# Altium PCB v1.5 PCB.PcbDoc (part 2 of 2)
Units mm, origin at the board's own origin, x right, y up, seen from the top; angles counter-clockwise.
Board outline 35.67 x 48.94 mm, 4 copper layers (Top Power Plane, Internal Ground Plane, Internal Signal Plane, Bottom Signal Layer), stack 0.972 mm thick; 81 components, 63 nets, 319 pads, 139 vias.
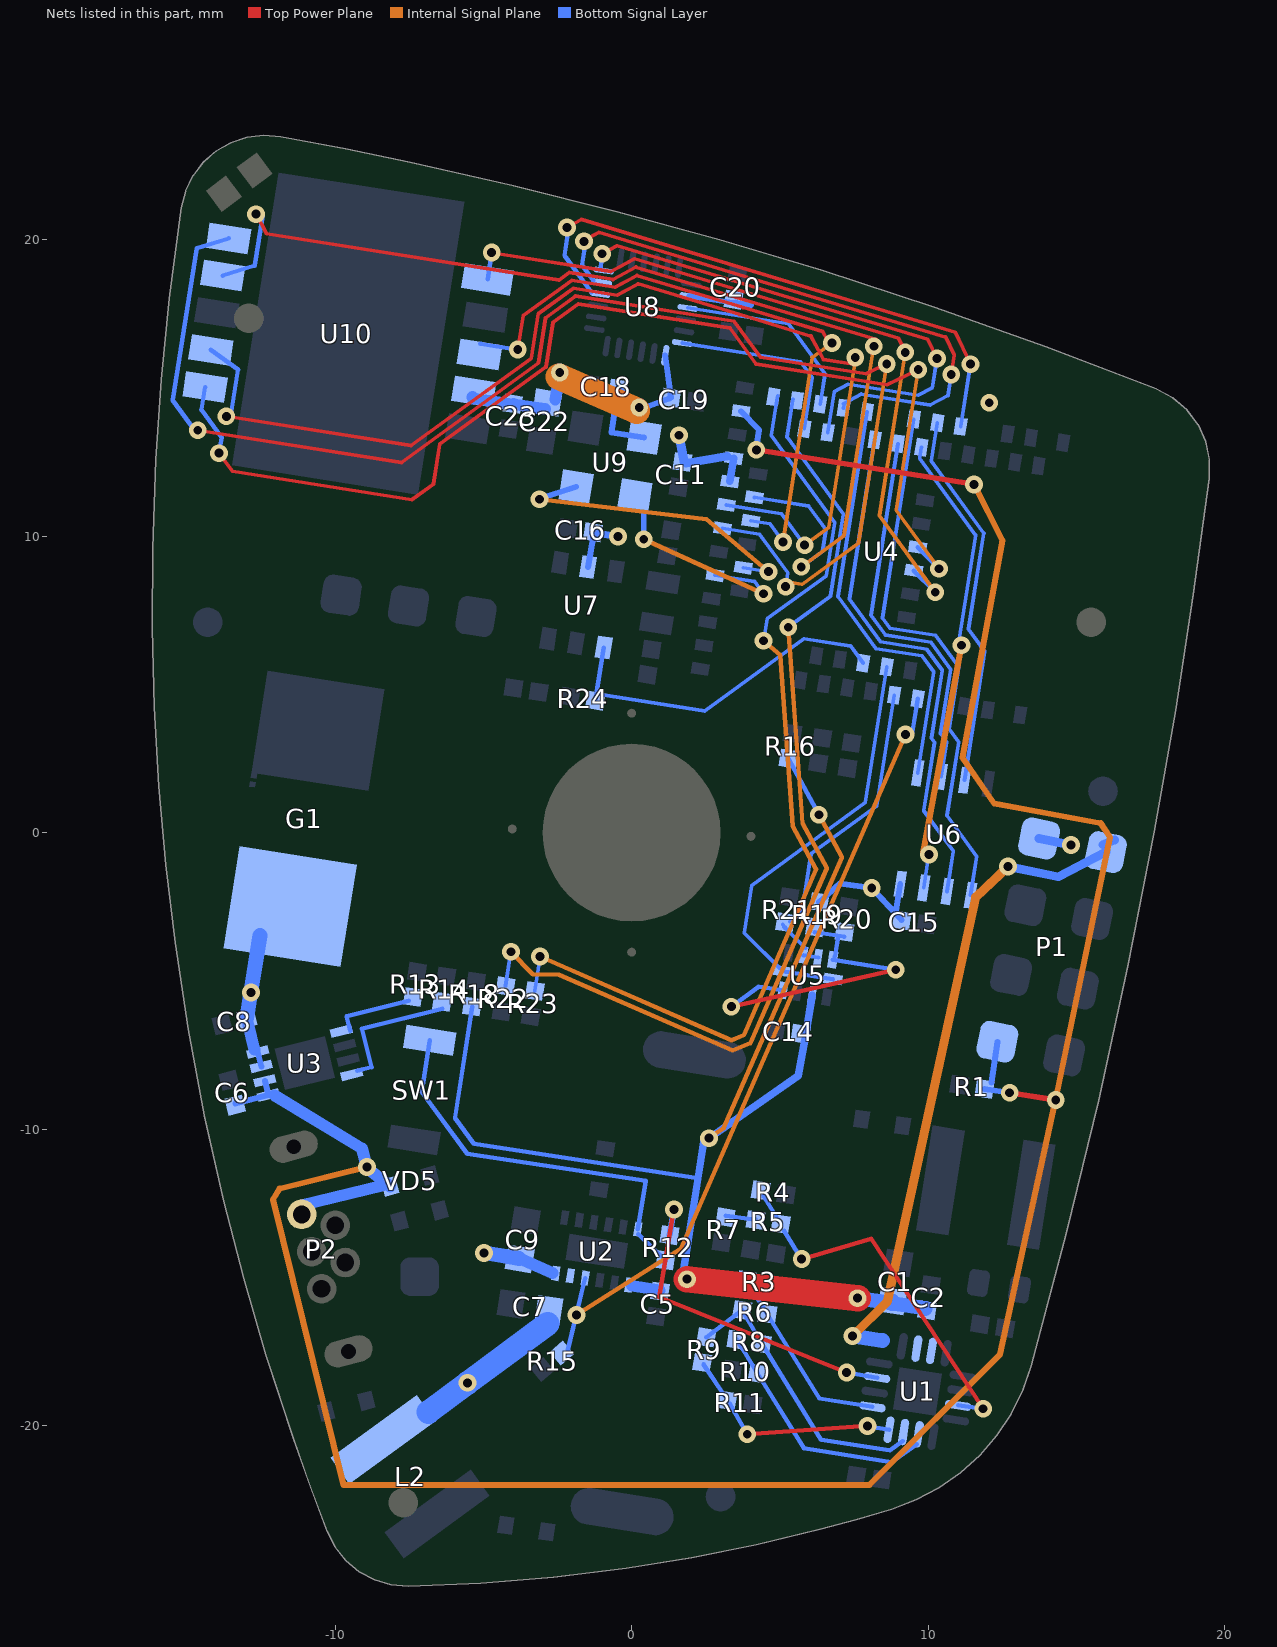
[diagram p4: the nets of this part, all layers, seen from the top]

## Via types
v1: diameter 0.6, hole 0.3, Top Power Plane to Bottom Signal Layer, tented both sides, 139 vias

## Nets (pads, with @x,y where several pads share a name; then routed paths per layer and width w, separated by ;. In a path a pad name is that pad's centre, name@x,y a point inside that pad or via, vN(x,y) a via of type N, cw(c..) or ccw(c..) an arc to the next point about the centre after c; other vN are vias at no path point) (continued)
NetR3_2: R3.2 R6.1 U1.9 | length 6.5
  Bottom Signal Layer w0.15: R3.2@3.861,-15.099 3.921,-15.195 4.515,-16.146 R6.1@4.575,-16.242 ; R6.1@4.576,-16.243 6.328,-19.086 U1.9@8.122,-19.369
NetR4_2: R4.2 R5.1 U1.3 | length 12.4
  Top Power Plane w0.15: v1(5.735,-14.386) 8.082,-13.696 v1(11.858,-19.434)
  Bottom Signal Layer w0.15: R4.2@4.442,-12.242 R5.1@5.031,-13.198 ; R5.1@5.146,-13.43 v1(5.735,-14.386) ; U1.3@11.015,-19.321 v1(11.858,-19.434)
NetR5_2: R5.2 R7.1 | length 1
  Bottom Signal Layer w0.15: R7.1@3.182,-12.927 R5.2@4.182,-13.064
NetR6_2: R6.2 R8.1 R9.1 U1.7 | length 9.5
  Bottom Signal Layer w0.15: R9.1@2.517,-17.025 2.52,-17.024 3.664,-16.155 R6.2@3.725,-16.108 ; R6.2@3.726,-16.109 3.785,-16.208 4.086,-16.714 4.337,-17.135 4.396,-17.235 R8.1@4.4,-17.242 ; R8.1@4.4,-17.242 6.393,-20.476 8.704,-20.84 U1.7@9.146,-20.522
NetR8_2: R8.2 R10.1 U1.6 | length 8.4
  Bottom Signal Layer w0.15: R8.2@3.551,-17.108 3.606,-17.198 3.864,-17.616 3.935,-17.731 4.193,-18.149 R10.1@4.25,-18.242 ; R10.1@4.25,-18.242 4.253,-18.247 5.809,-20.771 8.772,-21.238 U1.6@9.624,-20.625
NetR9_2: R9.2 R11.1 U1.8 | length 7.4
  Top Power Plane w0.15: v1(3.9,-20.292) v1(7.961,-20.014)
  Bottom Signal Layer w0.15: R9.2@2.425,-17.937 2.426,-17.938 R11.1@3.226,-19.133 ; R11.1@3.295,-19.252 v1@3.9,-20.292 ; v1@7.958,-20.027 U1.8@8.683,-20.141
NetR12_1: R12.1 U1.11 | length 11.7
  Top Power Plane w0.15: v1(1.427,-12.714) 0.929,-15.665 v1(7.253,-18.209)
  Bottom Signal Layer w0.15: v1@7.312,-18.221 U1.11@8.279,-18.381
  Bottom Signal Layer w0.2: R12.1@1.278,-13.577 v1(1.427,-12.714)
NetR12_2: R12.2 SW1.1 U2.12 | length 13.4
  Bottom Signal Layer w0.15: SW1.1@-6.808,-7.006 -7.075,-8.749 -5.55,-10.825 0.471,-11.748 U2.12@0.208,-13.382 ; U2.12@0.227,-13.54 R12.2@1.144,-14.427
NetR13_2: R13.2 U3.5 | length 2.7
  Bottom Signal Layer w0.15: U3.5@-9.495,-6.681 -9.51,-6.624 -9.617,-6.195 R13.2@-7.512,-5.667
NetR14_1: R14.1 U3.8 | length 4.6
  Bottom Signal Layer w0.15: U3.8@-9.257,-8.029 -8.773,-7.907 -9.097,-6.616 R14.1@-6.38,-5.935
NetR15_1: R15.1 U2.4 U4.4 | length 26.9
  Internal Signal Plane w0.15: v1(-1.864,-16.273) 1.671,-14.03 v1(9.238,3.312)
  Bottom Signal Layer w0.15: R15.1@-2.172,-17.526 -1.87,-16.272 U2.4@-1.571,-15.024 ; v1@9.457,3.314 U4.4@9.646,4.514
NetR19_2: R19.2 R20.1 U5.4 U5.9 | length 11.5
  Top Power Plane w0.15: v1(3.364,-5.87) v1(8.91,-4.624)
  Bottom Signal Layer w0.15: v1(3.364,-5.87) 4.295,-5.192 U5.9@5.102,-5.319 ; R19.2@6.184,-3.354 7.159,-3.503 7.164,-3.504 R20.1@7.18,-3.506 ; U5.4@6.783,-4.289 v1(8.91,-4.624) ; U5.4@6.859,-4.176 R20.1@6.968,-3.493
NetR21_1: R21.1 U4.6 U5.2 U5.3 | length 10.8
  Bottom Signal Layer w0.125: R21.1@5.097,-3.099 5.138,-3.155 5.143,-3.161 R21.1@5.17,-3.198 ; R21.1@5.167,-3.192 R21.1@5.17,-3.198 ; R21.1@5.19,-3.221 R21.1@5.177,-3.208 ; R21.1@5.337,-3.003 5.738,-2.711 6.052,-0.713 8.267,0.899 U4.6@8.856,4.639 ; U5.2@5.878,-3.904 5.183,-3.216 5.179,-3.211 R21.1@5.177,-3.208 ; R21.1@5.17,-3.198 5.171,-3.201 5.172,-3.203 R21.1@5.177,-3.208 ; R21.1@5.17,-3.198 5.172,-3.202 R21.1@5.177,-3.208
  Bottom Signal Layer w0.15: R21.1@5.148,-3.183 5.163,-3.196 5.167,-3.2 5.172,-3.205 5.179,-3.211 R21.1@5.19,-3.221 ; U5.2@5.796,-4.133 U5.3@6.29,-4.211
NetR22_1: R22.1 U4.35 | length 33.9
  Internal Signal Plane w0.15: v1(-4.073,-4.018) -3.334,-4.779 -2.446,-4.792 3.411,-7.347 4.01,-7.1 6.583,-1.203 5.764,0.312 v1(5.285,6.929)
  Bottom Signal Layer w0.125: R22.1@-4.256,-5.18 v1(-4.073,-4.018) ; v1@5.423,7.041 5.43,7.047 6.707,7.976 7.142,10.738 5.241,13.35 5.438,14.597 U4.35@5.442,14.623
NetR23_1: R23.1 U4.34 | length 33
  Internal Signal Plane w0.15: v1(-3.087,-4.181) 3.375,-7.001 3.787,-6.825 6.225,-1.236 5.434,0.228 5.017,5.985 v1(4.45,6.475)
  Bottom Signal Layer w0.125: R23.1@-3.27,-5.344 v1(-3.087,-4.181) ; v1@4.458,6.474 4.575,7.218 6.563,8.665 6.846,10.466 4.715,13.395 4.917,14.679 U4.34@4.925,14.727
NetR24_1: R24.1 U4.9 U7.1 | length 11.8
  Bottom Signal Layer w0.125: R24.1@-1.044,4.66 2.47,4.107 5.817,6.543 7.39,6.295 U4.9@7.812,5.716
  Bottom Signal Layer w0.15: R24.1@-1.225,4.448 U7.1@-0.94,6.242
NetU4_7: U4.7 U5.5 U5.10 | length 14.5
  Bottom Signal Layer w0.125: U5.10@5.093,-4.67 3.798,-3.387 4.051,-1.776 7.881,1.011 U4.7@8.602,5.591
  Bottom Signal Layer w0.15: U5.10@5.093,-4.67 U5.5@6.792,-4.939
NetU4_20: U4.20 U9.2 | length 7.2
  Internal Signal Plane w0.15: v1(0.408,9.899) v1(4.449,8.06)
  Bottom Signal Layer w0.125: U4.20@2.815,8.684 4.147,8.475 v1@4.449,8.06
  Bottom Signal Layer w0.2: v1(0.408,9.899) U9.2@0.408,10.801
NetU4_21: U4.21 U9.3 | length 10.6
  Internal Signal Plane w0.15: v1(-3.103,11.248) 2.526,10.575 v1(4.616,8.805)
  Bottom Signal Layer w0.125: U4.21@3.766,8.939 v1(4.616,8.805)
  Bottom Signal Layer w0.2: v1@-3.107,11.265 U9.3@-1.869,11.669
NetU4_24: U4.24 U10.10 | length 46.6
  Top Power Plane w0.125: v1(-14.638,13.575) -7.764,12.488 -3.143,15.848 -2.904,17.364 -1.891,18.101 3.457,17.255 4.342,16.039 7.907,15.476 v1(8.607,15.812)
  Internal Signal Plane w0.125: v1@5.351,8.44 5.747,8.377 7.655,9.766 v1(8.607,15.812)
  Bottom Signal Layer w0.125: U4.24@3.065,10.265 4.316,10.068 5.269,8.758 v1(5.196,8.297)
  Bottom Signal Layer w0.15: v1@-14.715,13.531 -15.485,14.59 -14.673,19.711 U10.10@-13.595,20.046
NetU4_25: U4.25 U10.3 | length 22.2
  Top Power Plane w0.125: v1@-3.838,16.295 -3.655,17.446 -2.024,18.63 -0.558,18.398 0.177,18.792 ; v1@6.55,16.416 6.553,16.411 v1@6.562,16.393 ; v1@6.593,16.628 6.444,16.905 3.752,17.717 0.196,18.789 ; 0.177,18.792 0.196,18.789 ; 0.177,18.792 0.18,18.794 0.196,18.789
  Internal Signal Plane w0.125: v1(5.107,9.809) 6.087,16.032 v1(6.76,16.522) ; v1@6.994,16.485 6.996,16.492 v1@6.996,16.495
  Bottom Signal Layer w0.125: U4.25@4.016,10.519 4.665,10.417 v1(5.107,9.809)
  Bottom Signal Layer w0.15: U10.3@-5.109,16.49 -5.078,16.485 v1(-3.842,16.296)
NetU4_26: U4.26 U10.7 | length 37.4
  Top Power Plane w0.125: v1(-13.671,14.043) -7.442,13.059 -3.387,16 -3.147,17.506 -1.962,18.365 -0.487,18.132 0.218,18.511 3.629,17.482 6.048,16.752 6.473,15.961 7.493,15.8 7.487,15.801 v1@7.478,15.804
  Internal Signal Plane w0.125: v1(5.838,9.697) 6.652,10.29 7.555,16.025 v1@7.555,16.027
  Bottom Signal Layer w0.125: U4.26@3.19,11.055 5.057,10.761 v1@5.788,9.756
  Bottom Signal Layer w0.15: U10.7@-14.191,16.283 -13.277,15.622 -13.531,14.021 v1@-13.546,13.927
  other v1: 7.545,16.027
NetU4_27: U4.27 U10.9 | length 37.6
  Top Power Plane w0.125: v1(-12.667,20.863) -12.312,20.202 -2.447,18.643 -2.106,18.896 -0.63,18.663 0.146,19.079 8.239,16.638 8.24,16.638 8.241,16.638 v1@8.25,16.635
  Internal Signal Plane w0.125: v1(5.722,8.966) 7.164,10.016 v1(8.171,16.409)
  Bottom Signal Layer w0.125: U4.27@4.142,11.309 5.973,11.021 6.555,10.221 6.439,9.488 v1(5.722,8.966)
  Bottom Signal Layer w0.15: U10.9@-13.794,18.792 -12.716,19.128 v1@-12.447,20.824
NetU4_36: U4.36 U8.12 | length 6.5
  Bottom Signal Layer w0.125: U8.12@1.705,16.517 5.702,15.887 6.096,15.346 U4.36@5.824,13.624
NetU4_37: U4.37 U8.9 | length 6.6
  Bottom Signal Layer w0.125: U8.9@1.893,17.702 5.289,17.167 6.521,15.474 U4.37@6.36,14.451
NetU4_38: U4.38 U8.24 | length 18.6
  Top Power Plane w0.125: v1(-0.993,19.527) -0.487,19.799 9.992,16.639 v1(10.299,15.998)
  Bottom Signal Layer w0.125: U4.38@6.615,13.499 6.831,14.873 7.298,15.124 9.666,14.751 10.143,15.008 v1(10.299,15.998)
  Bottom Signal Layer w0.15: U8.24@-1.065,18.98 v1@-0.982,19.526
NetU4_39: U4.39 U8.23 | length 20.2
  Top Power Plane w0.125: v1@-1.54,20.016 -1.109,20.248 10.595,16.718 10.886,16.112 ; v1(10.782,15.457) 10.886,16.112 ; 10.888,16.11 10.886,16.112
  Bottom Signal Layer w0.125: U4.39@7.15,14.325 U4.39@7.176,14.487 ; U4.39@7.15,14.473 U4.39@7.176,14.487 ; 7.747,14.795 7.742,14.792 ; v1(10.782,15.457) 10.67,14.746 10.073,14.424 7.742,14.792 ; U4.39@7.176,14.487 7.742,14.792
  Bottom Signal Layer w0.15: v1@-1.54,20.016 -1.552,19.94 -1.673,19.144 U8.23@-1.286,18.618
  other v1: -1.605,19.948
NetU4_41: U4.41 U6.1 | length 14.2
  Bottom Signal Layer w0.125: U4.41@7.941,14.2 6.959,7.966 8.238,6.209 9.801,5.963 10.192,5.425 U6.1@9.655,2.015
NetU4_42: U4.42 U6.6 | length 17.6
  Bottom Signal Layer w0.125: U4.42@8.195,13.249 7.349,7.875 8.395,6.437 9.955,6.191 10.477,5.475 10.116,3.186 10.217,3.048 9.854,0.741 10.854,-0.634 U6.6@10.641,-1.988
NetU4_43: U4.43 U6.2 | length 14.6
  Bottom Signal Layer w0.125: 8.759,11.689 U4.43@8.985,13.124 8.073,7.333 8.558,6.667 10.097,6.425 10.76,5.513 10.419,3.346 10.629,3.057 U6.2@10.445,1.89
NetU4_44: U4.44 U6.5 | length 18.3
  Bottom Signal Layer w0.125: U4.44@9.521,13.95 8.465,7.243 8.716,6.898 10.251,6.656 11.037,5.576 10.71,3.502 11.03,3.062 10.639,0.58 11.639,-0.793 U6.5@11.431,-2.113
NetU4_45: U4.45 U6.7 | length 15.6
  Internal Signal Plane w0.2: v1@9.834,-0.703 v1(11.123,6.322)
  Bottom Signal Layer w0.125: U4.45@9.775,12.999 9.717,12.631 11.605,10.038 11.038,6.439 v1(11.123,6.322) ; U6.7@9.851,-1.863 v1(10.028,-0.738)
NetU4_46: U4.46 U6.3 | length 12.9
  Bottom Signal Layer w0.125: U4.46@10.311,13.825 10.108,12.537 11.876,10.108 ; U6.3@11.226,1.766 11.911,6.115 11.365,6.864 11.876,10.108 ; 11.884,10.096 11.876,10.108
NetU4_48: U4.48 U8.22 | length 19.6
  Top Power Plane w0.125: v1@-2.176,20.423 -2.102,20.463 -1.689,20.685 10.914,16.884 v1(11.433,15.804)
  Bottom Signal Layer w0.125: U4.48@11.101,13.7 v1(11.433,15.804)
  Bottom Signal Layer w0.15: v1@-2.111,20.48 -2.122,20.408 -2.265,19.471 U8.22@-1.358,18.236
  other v1: -2.176,20.417
NetU4_58: U4.58 U10.1 | length 25.5
  Top Power Plane w0.125: v1(-4.721,19.566) -0.704,18.931 0.097,19.361 9.005,16.675 v1(9.232,16.202)
  Internal Signal Plane w0.125: v1(9.232,16.202) 8.364,10.693 v1(10.244,8.111)
  Bottom Signal Layer w0.15: U10.1@-4.859,18.663 v1(-4.721,19.566) ; U4.58@9.521,8.837 v1@10.244,8.115
NetU4_59: U4.59 U10.6 | length 39.2
  Top Power Plane w0.125: v1(-13.918,12.802) -13.47,12.186 -7.414,11.229 -6.681,11.762 -6.468,13.109 ; -6.469,13.109 -2.891,15.711 -2.654,17.208 -1.797,17.832 3.315,17.024 4.199,15.808 ; 4.206,15.799 4.199,15.808 ; v1(9.67,15.619) 8.612,15.111 4.199,15.808
  Internal Signal Plane w0.125: v1(9.67,15.619) 8.924,10.886 v1(10.369,8.901)
  Bottom Signal Layer w0.15: U10.6@-14.39,15.029 -14.511,14.268 -13.833,13.335 v1(-13.918,12.802) ; U4.59@9.646,9.627 v1@10.369,8.905
"VCC_CHARGE 3.0 - 4.2 V": C8.1 G1.1 P1.2 U1.14 U3.3 U3.4 | length 26.3
  Internal Signal Plane w0.3: v1(7.454,-16.98) 8.633,-15.8 11.606,-2.174 v1(12.701,-1.141)
  Bottom Signal Layer w0.2: U3.4@-12.613,-7.398 U3.3@-12.492,-7.883
  Bottom Signal Layer w0.3: v1(12.701,-1.141) 14.382,-1.489 P1.2@15.998,-0.658 ; P1.2@15.899,-0.407 P1.2@16.298,-0.25
  Bottom Signal Layer w0.4: C8.1@-12.935,-6.46 -12.934,-6.465 -12.933,-6.467 U3.4@-12.727,-7.316
  Bottom Signal Layer w0.5: C8.1@-12.981,-6.263 v1(-12.843,-5.391) G1.1@-12.538,-3.471 ; v1(7.454,-16.98) 8.46,-17.134
"VCC_LOAD 1.8 V": C9.1 C15.1 C18.1 C19.1 C20.1 C22.1 C23.1 R19.1 U2.6 U6.8 U8.8 U8.13 U9.1 U10.4 | length 21.2
  Internal Signal Plane w0.9: v1@-2.45,15.384 v1@0.176,14.235
  Bottom Signal Layer w0.2: C18.1@-0.454,14.981 -0.683,13.501 U9.1@0.419,13.331 ; v1@0.298,14.286 C19.1@1.281,14.651 ; U8.13@1.133,16.101 C19.1@1.325,14.671 ; U8.8@1.955,18.097 3.417,17.874 3.426,17.872 C20.1@3.429,17.872 ; C20.1@3.517,17.881 3.552,17.876 3.561,17.875 4.027,17.801 ; R19.1@6.327,-2.341 7.023,-1.711 v1(8.101,-1.871) C15.1@8.904,-2.733 ; U6.8@9.061,-1.738 C15.1@8.904,-2.733 ; C15.1@9.106,-2.95 C15.1@8.904,-2.733
  Bottom Signal Layer w0.25: C18.1@-0.454,14.981 -0.453,14.98 v1@0.245,14.335
  Bottom Signal Layer w0.4: U10.4@-5.366,14.693 -5.357,14.65 C23.1@-4.028,14.443 ; C23.1@-3.986,14.455 C22.1@-2.924,14.29 ; C9.1@-3.774,-14.368 U2.6@-2.668,-14.857 ; C22.1@-2.578,14.609 v1(-2.425,15.52)
  Bottom Signal Layer w0.5: v1(-4.975,-14.175) C9.1@-3.795,-14.364
  other v1: 0.256,14.347 12.065,14.501
"VCC_MAIN 1.8 V": C7.1 C11.1 C16.1 L2.1 P1.1 U2.5 U4.28 U4.30 U7.5 | length 11.3
  Bottom Signal Layer w0.2: U7.5@-1.472,8.959 -1.27,10.118 -1.268,10.126 -1.268,10.127 -1.253,10.212 C16.1@-1.253,10.214
  Bottom Signal Layer w0.25: C16.1@-1.308,10.124 -1.302,10.123 -1.27,10.118 v1(-0.462,9.99) ; U4.28@3.315,11.845 U4.30@3.44,12.635
  Bottom Signal Layer w0.3: v1(1.598,13.407) 1.763,12.539 1.764,12.534 C11.1@1.767,12.515 ; C11.1@1.835,12.463 U4.30@3.218,12.699 ; P1.1@13.745,-0.196 v1(14.818,-0.415)
  Bottom Signal Layer w0.8: L2.1@-6.852,-19.541 -5.534,-18.566 -2.831,-16.567
  other v1: -5.539,-18.559
"VCC_STORE 3.0 - 4.2 V": C1.1 C2.1 C5.1 C14.1 R16.2 R18.2 U1.15 U2.1 U5.7 | length 48.5
  Top Power Plane w0.9: v1(1.866,-15.063) v1(7.624,-15.703)
  Internal Signal Plane w0.15: v1@2.595,-10.343 2.611,-10.307 v1@2.612,-10.304 ; v1(2.609,-10.306) v1@2.612,-10.304 ; v1(6.315,0.604) 7.091,-0.831 3.103,-9.97 v1@2.612,-10.304
  Bottom Signal Layer w0.15: R18.2@-5.381,-5.866 R18.2@-5.383,-5.868 -5.957,-9.625 -5.315,-10.5 2.237,-11.657 ; R16.2@5.291,2.496 v1(6.315,0.604)
  Bottom Signal Layer w0.25: v1@1.704,-15.07 1.709,-15.039 2.237,-11.657 v1@2.447,-10.314 ; v1(2.609,-10.306) 5.625,-8.201 5.872,-6.816 5.872,-6.814 U5.7@6.089,-5.476
  Bottom Signal Layer w0.4: U2.1@0.009,-15.281 C5.1@0.948,-15.441
  Bottom Signal Layer w0.5: v1@7.624,-15.705 8.781,-15.879 C2.1@9.902,-16.048 ; v1(7.624,-15.703) C1.1@8.781,-15.869 ; C1.1@8.778,-15.857 C1.1@8.794,-15.795
"VCC_USB 5.0 V": C6.1 P1.7 P2.1 R1.1 U3.1 U3.2 U4.32 VD5.2 | length 93.2
  Top Power Plane w0.2: v1(4.206,12.914) v1@11.555,11.753 ; v1(12.752,-8.774) v1(14.306,-9.014)
  Internal Signal Plane w0.2: v1(-8.928,-11.279) -11.875,-12.009 -12.097,-12.375 -9.715,-22.007 8.019,-22.007 12.429,-17.597 14.302,-9.014 14.307,-8.991 14.327,-8.9 16.133,-0.161 15.825,0.32 12.233,0.979 11.165,2.527 12.51,9.858 v1(11.554,11.748)
  Bottom Signal Layer w0.2: C6.1@-13.372,-9.135 U3.1@-12.25,-8.854 U3.2@-12.371,-8.368 ; U4.32@3.691,14.215 4.299,13.581 v1@4.197,12.916 ; R1.1@11.9,-8.642 v1(12.752,-8.774) ; R1.1@12.136,-8.425 P1.7@12.338,-7.053
  Bottom Signal Layer w0.4: U3.1@-12.052,-8.858 -9.096,-10.652 v1@-8.941,-11.282 ; P2.1@-11.137,-12.573 -8.419,-11.908 ; v1@-8.935,-11.308 VD5.2@-8.151,-11.931
pads on no net: Designator3.0 Designator4.0 Designator5.0 Designator6.0 Designator7.0 Designator8.0 P2.4 U2.7 U3.7 U4.3 U4.5 U4.8 U4.10 U4.11 U4.12 U4.13 U4.19 U4.22 U4.23 U4.29 U4.31 U4.40 U4.47 U4.49 U4.50 U4.52 U4.54 U4.56 U4.57 U4.60 U4.61 U8.1 U8.2 U8.3 U8.4 U8.5 U8.6 U8.7 U8.14 U8.15 U8.16 U8.17 U8.19 U8.21 U10.2 U10.8
copper on no net: | length 116.8
  Top Power Plane w0.9: -14.395,-3.233 -14.395,4.242 ; -1.601,9.338 -0.808,14.557 cw(c0.242,14.334) 1.152,14.905 ; 16.199,-1.76 17.99,9.073
  Top Power Plane w1.5: -14.7,7.275 -1.475,9.175 ; -14.1,-3.275 -0.875,-6.525 ; -14.1,4.2 -0.875,6.125 ; 0.845,11.766 17.692,9.083 ; 1.475,-5.025 15.9,-1.75 ; 1.475,14.874 17.096,12.386
  Bottom Signal Layer w0.15: -9.66,-14.501 -7.15,-14.975

## Polygon pours and split planes (outlines as drawn)
GND on Internal Ground Plane "GND_L02_P025" (solid, remove dead copper, pour order 25): 13.483,-17.983 14.666,-13.524 15.752,-9.037 16.742,-4.516 17.633,0.028 18.349,4.133 18.953,8.035 19.483,11.945 19.493,12.574 19.366,13.189 19.108,13.762 18.731,14.264 18.254,14.673 17.699,14.968 13.978,16.394 10.218,17.727 6.418,18.966 2.97,19.999 -0.497,20.952 -3.981,21.824 -7.475,22.614 -9.651,23.063 -11.832,23.481 -12.405,23.527 -12.976,23.459 -13.521,23.279 -14.02,22.993 -14.451,22.613 -14.799,22.156 -15.048,21.638 -15.189,21.081 -15.59,18.029 -15.864,15.281 -16.051,12.573 -16.161,9.583 -16.174,6.898 -16.104,4.225 -15.952,1.565 -15.718,-1.082 -15.403,-3.717 -14.957,-6.634 -14.41,-9.538 -13.762,-12.432 -13.091,-15.028 -12.338,-17.611 -11.403,-20.474 -10.849,-22.033 -10.267,-23.581 -10.003,-24.101 -9.639,-24.556 -9.191,-24.929 -8.677,-25.203 -8.118,-25.367 -7.537,-25.415 -5.086,-25.317 -2.636,-25.117 -0.18,-24.815 2.019,-24.458 4.2,-24.02 6.355,-23.503 7.568,-23.174 8.774,-22.819 9.597,-22.509 10.375,-22.099 11.096,-21.595 11.748,-21.004 12.321,-20.337 12.806,-19.603 13.195,-18.814
"VCC_MAIN 1.8 V" on Internal Signal Plane "VCC_MAIN_1.8_V_L03_P023" (solid, remove dead copper, pour order 23): 13.483,-17.983 14.666,-13.524 15.752,-9.037 16.742,-4.516 17.633,0.028 18.349,4.133 18.953,8.035 19.483,11.945 19.493,12.574 19.366,13.189 19.108,13.762 18.731,14.264 18.254,14.673 17.699,14.968 13.978,16.394 10.218,17.727 6.418,18.966 2.97,19.999 -0.497,20.952 -3.981,21.824 -7.475,22.614 -9.651,23.063 -11.832,23.481 -12.405,23.527 -12.976,23.459 -13.521,23.279 -14.02,22.993 -14.451,22.613 -14.799,22.156 -15.048,21.638 -15.189,21.081 -15.59,18.029 -15.864,15.281 -16.051,12.573 -16.161,9.583 -16.174,6.898 -16.104,4.225 -15.952,1.565 -15.718,-1.082 -15.403,-3.717 -14.957,-6.634 -14.41,-9.538 -13.762,-12.432 -13.091,-15.028 -12.338,-17.611 -11.403,-20.474 -10.849,-22.033 -10.267,-23.581 -10.003,-24.101 -9.639,-24.556 -9.191,-24.929 -8.677,-25.203 -8.118,-25.367 -7.537,-25.415 -5.086,-25.317 -2.636,-25.117 -0.18,-24.815 2.019,-24.458 4.2,-24.02 6.355,-23.503 7.568,-23.174 8.774,-22.819 9.597,-22.509 10.375,-22.099 11.096,-21.595 11.748,-21.004 12.321,-20.337 12.806,-19.603 13.195,-18.814
"VCC_CHARGE 3.0 - 4.2 V" on Internal Signal Plane "VCC_CHARGE_3.0_-_4.2_V_L03_P021" (solid, remove dead copper, pour order 21): 7.491,-16.683 -0.63,-15.602 -7.234,-7.152 -12.755,-5.181 -13.07,-5.654 -3.052,-18.034 3.028,-19.069 7.55,-17.262
NetL1_2 on Bottom Signal Layer "NETL1_2_L04_P015" (solid, pour order 15): 11.431,-15.384 10.688,-13.446 9.777,-13.446 10.527,-15.652 10.527,-17.209 10.789,-17.323 11.201,-16.911
"VCC_CHARGE 3.0 - 4.2 V" on Bottom Signal Layer "VCC_CHARGE_3.0_-_4.2_V_L04_P017" (solid, pour order 17): 9.806,-17.062 9.652,-16.565 8.256,-16.345 8.102,-17.33 8.924,-17.458 9.52,-17.055 9.52,-17.189
"VCC_LOAD 1.8 V" on Bottom Signal Layer "VCC_LOAD_1.8_V_L04_P000" (solid, remove dead copper, pour order 0): 12.396,12.875 2.337,14.466 2.822,18.29 9.279,17.247 12.85,16.031
GND on Bottom Signal Layer "GND_L04_P020" (solid, remove dead copper, pour order 20): 13.483,-17.983 14.666,-13.524 15.752,-9.037 16.742,-4.516 17.633,0.028 18.349,4.133 18.953,8.035 19.483,11.945 19.493,12.574 19.366,13.189 19.108,13.762 18.731,14.264 18.254,14.673 17.699,14.968 13.978,16.394 10.218,17.727 6.418,18.966 2.97,19.999 -0.497,20.952 -3.981,21.824 -7.475,22.614 -9.651,23.063 -11.832,23.481 -12.405,23.527 -12.976,23.459 -13.521,23.279 -14.02,22.993 -14.451,22.613 -14.799,22.156 -15.048,21.638 -15.189,21.081 -15.59,18.029 -15.864,15.281 -16.051,12.573 -16.161,9.583 -16.174,6.898 -16.104,4.225 -15.952,1.565 -15.718,-1.082 -15.403,-3.717 -14.957,-6.634 -14.41,-9.538 -13.762,-12.432 -13.091,-15.028 -12.338,-17.611 -11.403,-20.474 -10.849,-22.033 -10.267,-23.581 -10.003,-24.101 -9.639,-24.556 -9.191,-24.929 -8.677,-25.203 -8.118,-25.367 -7.537,-25.415 -5.086,-25.317 -2.636,-25.117 -0.18,-24.815 2.019,-24.458 4.2,-24.02 6.355,-23.503 7.568,-23.174 8.774,-22.819 9.597,-22.509 10.375,-22.099 11.096,-21.595 11.748,-21.004 12.321,-20.337 12.806,-19.603 13.195,-18.814
"VCC_LOAD 1.8 V" on Top Power Plane "VCC_LOAD_1.8_V_L01_P026" (solid, remove dead copper, pour order 26): 13.483,-17.983 14.666,-13.524 15.752,-9.037 16.742,-4.516 17.633,0.028 18.349,4.133 18.953,8.035 19.483,11.945 19.493,12.574 19.366,13.189 19.108,13.762 18.731,14.264 18.254,14.673 17.699,14.968 13.978,16.394 10.218,17.727 6.418,18.966 2.97,19.999 -0.497,20.952 -3.981,21.824 -7.475,22.614 -9.651,23.063 -11.832,23.481 -12.405,23.527 -12.976,23.459 -13.521,23.279 -14.02,22.993 -14.451,22.613 -14.799,22.156 -15.048,21.638 -15.189,21.081 -15.59,18.029 -15.864,15.281 -16.051,12.573 -16.161,9.583 -16.174,6.898 -16.104,4.225 -15.952,1.565 -15.718,-1.082 -15.403,-3.717 -14.957,-6.634 -14.41,-9.538 -13.762,-12.432 -13.091,-15.028 -12.338,-17.611 -11.403,-20.474 -10.849,-22.033 -10.267,-23.581 -10.003,-24.101 -9.639,-24.556 -9.191,-24.929 -8.677,-25.203 -8.118,-25.367 -7.537,-25.415 -5.086,-25.317 -2.636,-25.117 -0.18,-24.815 2.019,-24.458 4.2,-24.02 6.355,-23.503 7.568,-23.174 8.774,-22.819 9.597,-22.509 10.375,-22.099 11.096,-21.595 11.748,-21.004 12.321,-20.337 12.806,-19.603 13.195,-18.814

## Other copper
Top Power Plane:
  pour cut-out: 2.85,2.85 cw(c0,0) 2.85,-2.85 cw(c0,0) -2.85,-2.85 cw(c0,0) -2.85,2.85 cw(c0,0)
  pour cut-out: -7.761,24.702 -17.335,17.243 -15.952,25.999
Internal Ground Plane:
  pour cut-out: 2.85,2.85 cw(c0,0) 2.85,-2.85 cw(c0,0) -2.85,-2.85 cw(c0,0) -2.85,2.85 cw(c0,0)
  pour cut-out: 20.274,15.397 15.242,16.194 13.918,7.836 12.733,8.024 12.483,6.444 13.668,6.256 13.058,2.404 16.811,1.81 18.201,1.606
Internal Signal Plane:
  pour cut-out: 2.85,2.85 cw(c0,0) 2.85,-2.85 cw(c0,0) -2.85,-2.85 cw(c0,0) -2.85,2.85 cw(c0,0)
  pour cut-out: -0.648,23.575 -3.167,7.673 -18.476,10.097 -15.957,25.999
  pour cut-out: 20.274,15.397 15.242,16.194 13.918,7.836 12.733,8.024 12.483,6.444 13.668,6.256 13.058,2.404 16.811,1.81 18.201,1.606
Bottom Signal Layer:
  region net GND: -0.177,8.171 -0.55,5.817 -0.099,5.746 0.274,8.1
  region net GND: 1.873,7.782 -0.749,8.197 -0.804,7.848 1.818,7.433
  region net GND: -0.167,8.169 -3.017,8.621 -3.244,7.187 -0.394,6.736
  pour cut-out: 4.665,17.184 4.591,16.251 5.949,15.992
  pour cut-out: -7.209,-18.689 -4.505,-22.41 -7.741,-24.761 -10.445,-21.04
  pour cut-out: 1.729,7.873 1.645,7.345 2.195,7.306
  pour cut-out: 12.408,-16.969 11.199,-17.201 11.404,-18.36
  pour cut-out: 4.509,15.184 4.257,15.006 4.49,14.698
  pour cut-out: 1.084,16.215 -1.743,16.66 -3.014,8.624 2.175,7.802 2.903,12.493 1.868,12.649
  pour cut-out: 6.44,-8.479 6.275,-9.484 5.518,-8.94
  pour cut-out: -8.141,-11.413 -6.5,-10.967 -5.901,-13.117 -7.559,-13.558
  pour cut-out: 12.173,3.81 11.353,2.401 12.376,2.252
  pour cut-out: 13.668,6.256 12.483,6.444 13.274,3.62
  pour cut-out: 7.57,1.703 6.269,1.896 7.261,0.453
  pour cut-out: 5.9,-1.891 5.492,-4.146 4.108,-3.683 4.2,-1.681
  pour cut-out: -2.978,-12.654 -4.127,-12.48 -4.778,-16.34 -3.649,-16.502
  pour cut-out: 12.427,-8.521 12.098,-10.383 9.447,-13.274 10.014,-15.028 5.534,-14.675
  pour cut-out: 0.323,-16.293 0.248,-16.74 0.507,-16.78
  pour cut-out: -2.857,-18.563 -3.829,-19.415 -4.498,-18.053
  pour cut-out: 10.091,-3.613 10.371,-3.66 10.441,-3.209
  pour cut-out: 10.375,0.333 12.165,0.178 12.352,1.391
  pour cut-out: 14.52,13.66 14.24,13.707 14.171,13.255
  region net "VCC_STORE 3.0 - 4.2 V": 10.304,-15.864 9.823,-16.388 10.047,-17.147 10.304,-17.17
  region net NetC3_1: 12.287,-18.852 11.42,-19.015 11.371,-18.836 12.16,-18.439
  region net NetC3_1: 13.195,-15.766 12.776,-15.683 12.733,-16.847
  region net "VCC_MAIN 1.8 V": -1.981,-15.212 -2.343,-15.809 -3.131,-15.593 -2.125,-15.117
  region net NetL2_2: -0.524,-15.262 -0.391,-16.194 -1.112,-16.029 -0.664,-15.262
  region net "VCC_STORE 3.0 - 4.2 V": 1.669,-14.839 2.019,-15.323 1.2,-15.819 1.023,-15.431
  pour cut-out: -0.648,23.575 -3.167,7.673 -18.476,10.097 -15.957,25.999
  pour cut-out: 20.274,15.397 15.242,16.194 13.918,7.836 12.733,8.024 12.483,6.444 13.668,6.256 13.058,2.404 16.811,1.81 18.201,1.606
  pour cut-out: -5.618,-4.51 -6.177,-4.4 -6.177,-4.909 -6.199,-4.931
  pour cut-out: -1.176,6.85 -2.85,7.108 -2.393,4.532

## Silkscreen, mask and mechanical layers (free items; w line width, h text height)
Top Overlay:
  drawing of 440 lines, arcs and shapes, not listed
Bottom Overlay:
  lines w0.2: -14.623,10.004 -14.346,11.757 -6.563,10.525 -6.841,8.771 -14.623,10.004 ; -1.822,2.448 ccw(c0.021,-0.164) 2.669,1.626 1.508,0.823 cw(c0.067,-0.172) -1.295,0.928 -0.52,0.805 -0.747,-0.63 0.673,-0.855 1.118,1.988 -1.822,2.448
  text "Rev. 1.5" at -7.475,9.325 h0.9 r351
Top Solder:
  lines w1.6: -14.7,7.275 -1.475,9.175 ; -14.1,-3.275 -0.875,-6.525 ; -14.1,4.2 -0.875,6.125 ; -13.5,-6.65 -1.475,-9.575 ; 0.845,11.766 17.692,9.083 ; 0.875,-8.35 15.3,-5.075 ; 1.475,-5.025 15.9,-1.75 ; 1.475,14.874 17.096,12.386
Mechanical 1:
  the board outline again, w0.15
Mechanical 2:
  the board outline again, w1.6
Mechanical 15:
  circle w0.2: c0,0 r4
  lines w0.15: -16.174,6.898 -16.104,4.225 -15.952,1.565 -15.718,-1.082 -15.403,-3.717 -14.957,-6.634 -14.41,-9.538 -13.762,-12.432 -13.091,-15.028 -12.338,-17.611 -11.403,-20.474 -10.849,-22.033 -10.267,-23.581 -10.003,-24.101 -9.639,-24.556 -9.191,-24.929 -8.677,-25.203 -8.118,-25.367 -7.537,-25.415 -5.086,-25.317 -2.636,-25.117 -0.18,-24.815 2.019,-24.458 4.2,-24.02 6.355,-23.503 7.568,-23.174 8.774,-22.819 9.597,-22.509 10.375,-22.099 11.096,-21.595 11.748,-21.004 12.321,-20.337 12.806,-19.603 13.195,-18.814 13.483,-17.983 14.666,-13.524 15.752,-9.037 16.742,-4.516 17.633,0.028 18.349,4.133 18.953,8.035 19.483,11.945 19.493,12.574 19.366,13.189 19.108,13.762 18.731,14.264 18.254,14.673 17.699,14.968 13.978,16.394 10.218,17.727 6.418,18.966 2.97,19.999 -0.497,20.952 -3.981,21.824 -7.475,22.614 -9.651,23.063 -11.832,23.481 -12.405,23.527 -12.976,23.459 -13.521,23.279 -14.02,22.993 -14.451,22.613 -14.799,22.156 -15.048,21.638 -15.189,21.081 -15.59,18.029 -15.864,15.281 -16.051,12.573 -16.161,9.583 -16.174,6.898

## Text inside footprints (layer, text, board x,y; h text height)
G1: Bottom Overlay "-" at -6.691,2.416 h1.5 r81; Bottom Overlay "+" at -7.547,-3.624 h1.5 r81